# Altium PCB PCB_Switch.PcbDoc
Units mm, origin at the board's own origin, x right, y up, seen from the top; angles counter-clockwise.
Board outline 11.18 x 15.75 mm, 2 copper layers (Top Layer, Bottom Layer); 4 components, 26 nets, 6 pads, 0 vias.
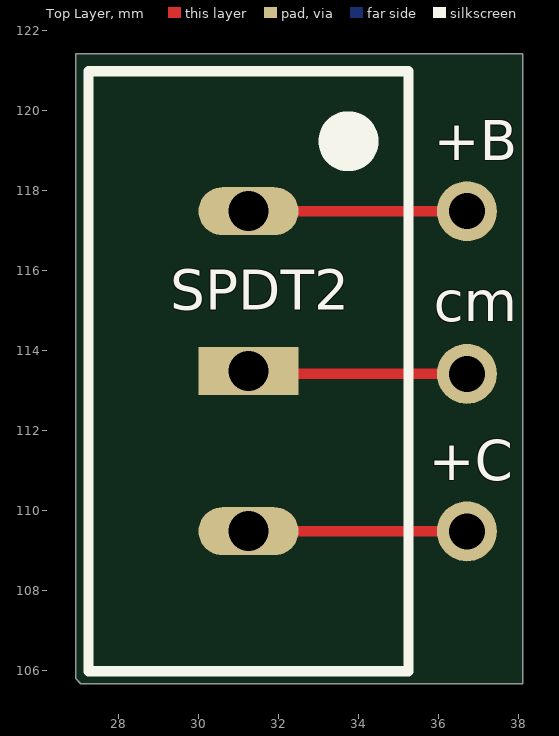
[diagram p0: Top Layer view]
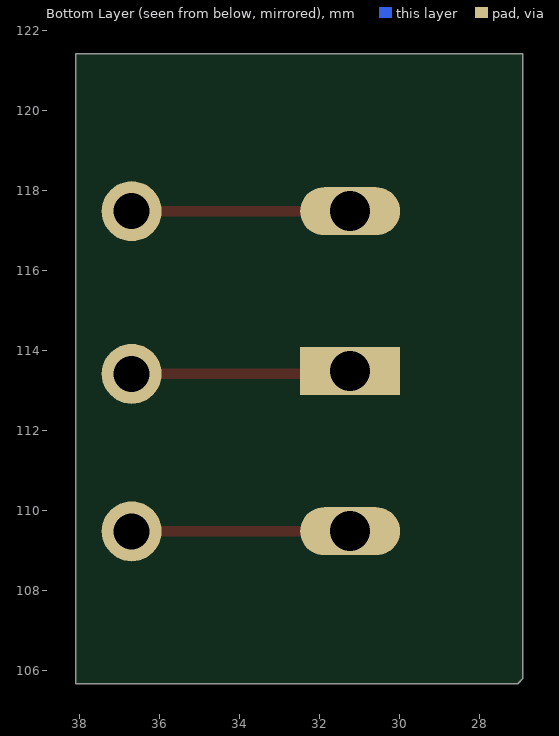
[diagram p1: Bottom Layer view, seen from below]

## Layer stack, top to bottom
Top Solder: solder mask 0.0102, Solder Resist, Dk 3.5
Top Layer: signal copper 0.0356
Dielectric 1: dielectric 0.32, FR-4, Dk 4.8
Bottom Layer: signal copper 0.0356
Bottom Solder: solder mask 0.0102, Solder Resist, Dk 3.5

## Board outline
38.1,121.412 38.1,105.664 27.051,105.664 26.924,105.791 26.924,121.412

## Design rules (kind name [scope] priority, off if disabled: settings)
Clearance [All] p1: gap=0.254 ignorepadtopadclearanceinfootprint=FALSE except(0: Arc-Hole Track-Hole SMDPad-Hole THPad-Hole Via-Hole Fill-Hole Poly-Hole Region-Hole Text-Hole)
PolygonConnect [All] p1: connectstyle=Relief reliefconductorwidth=0.254 reliefentries=4 polygonreliefangle="90 Angle" airgapwidth=0.254
RoutingVias [All] p1: holewidth=0.711 width=1.27 viastyle="Through Hole" minholewidth=0.711 minwidth=1.27 maxholewidth=0.711 maxwidth=1.27
SolderMaskExpansion [All] p1: expansion=0.102 istentingtop=FALSE
Width [All] p1: maxlimit=0.254 minlimit=0.254 preferedwidth=0.254
30 further rules are at their usual default settings.

## Classes and differential pairs
component class SCH_Switch: SPDT2
component class SCH_main: SPDT1

## Components (designator, comment, footprint, x,y, rotation, side; value= is the part's Value field where it differs from the comment)
+B "Board Pad" "BATTERY PAD" 36.703,117.475 r90 top (schematic designator bp23)
+C "Board Pad" "BATTERY PAD" 36.703,109.474 r90 top (schematic designator bp25)
cm "Board Pad" "BATTERY PAD" 36.703,113.411 r90 top (schematic designator bp24)
SPDT2 "spdt_JS202011SCQN" SPDT_1 31.242,113.475 r0 top

## Footprints (in the part's own frame and the unit in brackets; to place one, negate y for a bottom-side part, rotate by r counter-clockwise, add the part's x,y. Pads: shape width x height; smd on the part's side, far side on the other; paste and mask are expansions set on the pad)
"BATTERY PAD" [mm]
  round 1.5 hole 0.9 unplated: 1(0,0)
SPDT_1 [mm]
  rect 2.5x1.2 hole 1: 1(0,0)
  oval 2.5x1.2 hole 1: 2(0,4) 3(0,-4)
  silkscreen extent -4,-7.5 4,7.5, body extent -3.95,-7.5 3.95,7.54, height 12.45

## Part data
SPDT2: "C & K COMPONENTS - JS202011SCQN - SWITCH, DPDT, 0.6A, 6VDC, SMD", Contact Current Rating=300mA, Contact Resistance=70mR, Manufacturer="ITT C&K", Max Operating Temperature=85°C, Max Voltage Rating (DC)=6V, Min Operating Temperature=-20°C, Package Quantity=1, Actuator Length=2mm, Actuator Material=Nylon,Polyamide, Actuator Type=Standard, Category="Slide Switches", ComponentLink1Description=https://datasheet.ciiva.com/23829/1707718-23829488.pdf?src-supplier=Newark, ComponentLink1URL=https://datasheet.ciiva.com/23829/1707718-23829488.pdf?src-supplier=Newark, ComponentLink2Description=https://datasheet.ciiva.com/2889/js-29aug13-2889127.pdf?src-supplier=Digi-Key, ComponentLink2URL=https://datasheet.ciiva.com/2889/js-29aug13-2889127.pdf?src-supplier=Digi-Key, ComponentLink3Description=https://datasheet.ciiva.com/2889/js-15sept15-2889128.pdf?src-supplier=Digi-Key, ComponentLink3URL=https://datasheet.ciiva.com/2889/js-15sept15-2889128.pdf?src-supplier=Digi-Key, ComponentLink4Description=https://datasheet.ciiva.com/2889/js-15sept15-2889129.pdf?src-supplier=Digi-Key, ComponentLink4URL=https://datasheet.ciiva.com/2889/js-15sept15-2889129.pdf?src-supplier=Digi-Key, ComponentLink5Description=https://datasheet.ciiva.com/22630/1707718-22630697.pdf?src-supplier=Element14, ComponentLink5URL=https://datasheet.ciiva.com/22630/1707718-22630697.pdf?src-supplier=Element14, ComponentLink6Description=https://datasheet.ciiva.com/8625/js-9dec14-8625470.pdf?src-supplier=Avnet, ComponentLink6URL=https://datasheet.ciiva.com/8625/js-9dec14-8625470.pdf?src-supplier=Avnet, Contact Material="Copper Alloy", Contact Plating=Silver, Current Rating=300mA, Depth=7.5mm, Housing Material=Nylon, Lead Free="Lead Free", Length=9mm, Max Current Rating=300mA, Mount="Surface Mount", Orientation=Vertical, Packaging="Tape and Reel", Pricing 1="1=0.55000, 10=0.53000, 25=0.51040, 100=0.44180, 250=0.40252, 500=0.37306 (USD)", Radiation Hardening=No, REACH SVHC="No SVHC", RoHS=Yes, Supplier 1=Digi-Key, Switch Function=On-On, Switch Travel=2mm, Termination="Gull Wing", Throw Configuration=DPDT, Voltage Rating (DC)=6V

## Nets (pads, with @x,y where several pads share a name; then routed paths per layer and width w, separated by ;. In a path a pad name is that pad's centre, name@x,y a point inside that pad or via, vN(x,y) a via of type N, cw(c..) or ccw(c..) an arc to the next point about the centre after c; other vN are vias at no path point)
+5: 
+sch: 
-sch: 
a: 
b: 
B+: 
c: 
cmn: cm.1 SPDT2.1 | length 5.5
  Top Layer w0.254: SPDT2.1 31.306,113.411 cm.1
d: 
e: 
f: 
g: 
GND: 
ina: 
inb: 
Netbp15_1: 
Netbp16_1: 
Netbp17_1: 
Netbp18_1: 
Netbp19_1: 
Netbp21_1: 
Netbp22_1: 
Netbp23_1: +B.1 SPDT2.2 | length 5.5
  Top Layer w0.254: SPDT2.2 +B.1
Netbp25_1: +C.1 SPDT2.3 | length 5.5
  Top Layer w0.254: SPDT2.3 +C.1
NetIC2_20: 
VCC: 